# EAGLE board example_1 (EAGLE 7.0.0)
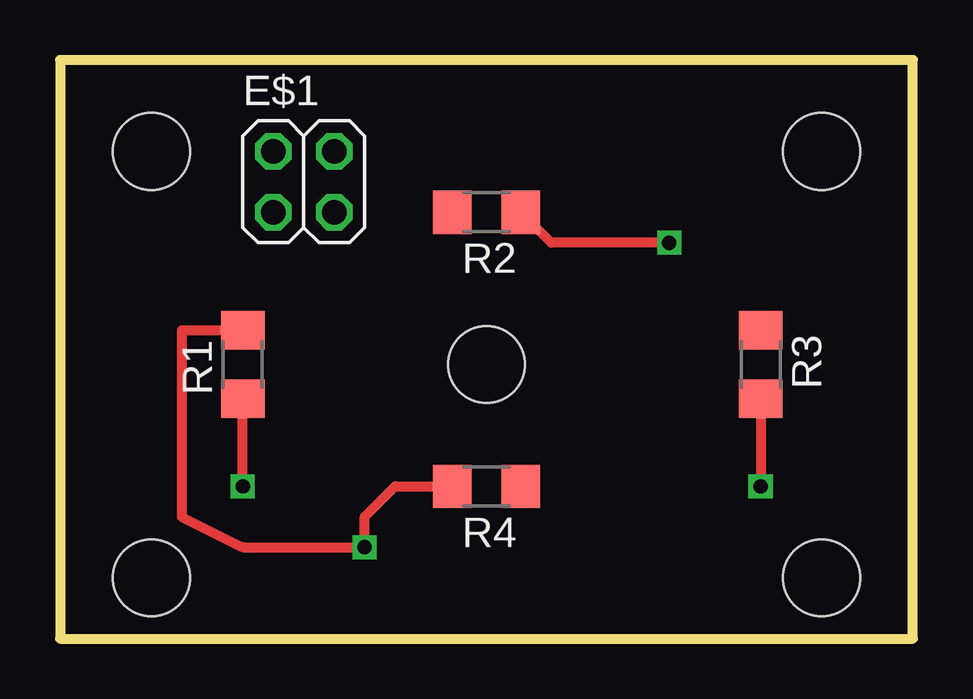
[diagram p0: board, top side]
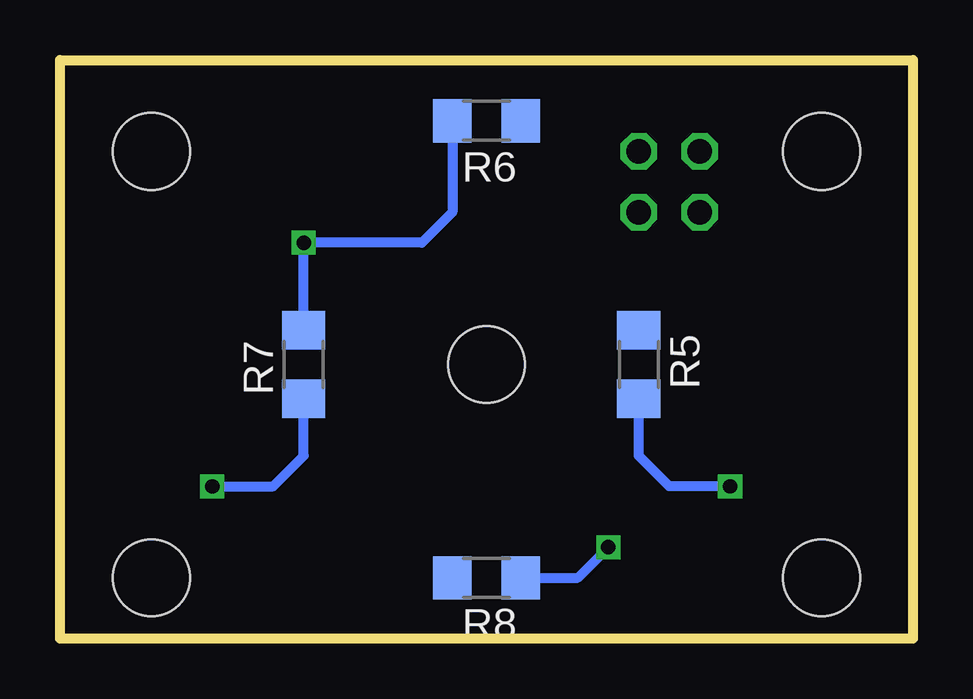
[diagram p1: board, bottom side, seen from below]

Size 35.56 x 24.13 mm. Coordinates in mm from the lower left corner, seen from the top.
Outline: 0,0 35.56,0 35.56,24.13 0,24.13 0,0
Copper layers (1*16): Top 0.035mm / dielectric 1.5mm / Bottom 0.035mm
Design rules "default": minimum track width 10mil, minimum drill 24mil, track to track 8mil, track to pad 8mil, pad to pad 8mil, via to via 8mil, smd to smd 8mil, copper to edge 40mil, drill to drill 8mil, minimum pad ring 10mil, minimum via ring 8mil, stop-mask expansion 4mil, vias tented up to drill 0mil, thermal gap 10mil
Holes 3.2 mm at 3.81,2.54 3.81,20.32 31.75,20.32 31.75,2.54 17.78,11.43
tKeepout: area 22.9,15.2 to 30.5,22.9; area 14.9,8.6 to 20.6,14.3
bKeepout: area 14.9,8.6 to 20.6,14.3
vRestrict: area 1.3,5.1 to 3.8,16.5; area 31.7,5.1 to 34.3,16.5

## Footprints (pad centres in the part's own frame; a part is rotated, then mirrored left to right if it is on the bottom)
2X02 = drill 1.016 octagon: 1 -1.27,-1.27; 2 -1.27,1.27; 3 1.27,-1.27; 4 1.27,1.27
R1206 = smd 1.6 x 1.803: 1 -1.422,0; 2 1.422,0

## Placement (x,y rotation side)
E$1  [2X02]  10.16,19.05 0 top
R1  [R1206]  7.62,11.43 90 top
R2  [R1206]  17.78,17.78 180 top
R3  [R1206]  29.21,11.43 270 top
R4  [R1206]  17.78,6.35 180 top
R5  [R1206]  11.43,11.43 270 bottom
R6  [R1206]  17.78,21.59 180 bottom
R7  [R1206]  25.4,11.43 90 bottom
R8  [R1206]  17.78,2.54 180 bottom

## Library data of the parts
E$1 = pinhead
R1-R8 = eagle-ltspice

## Nets
S$5: R1.1 R5.2
S$6: R1.2 R4.2 R8.1
S$7: R3.2 R7.1
S$8: R2.1 R6.2 R7.2

## Tracks (layer width: path | path; a pad name or v marks a point on that pad's centre or on a via)
S$1  (via drill 0.6)
  other vias: 7.62,6.35
S$2  (via drill 0.6)
  other vias: 29.21,6.35
S$3  (via drill 0.6)
  other vias: 25.4,16.51
S$5  (via drill 0.6)
  Top 0.406: v7.62,6.35 R1.1
  Bottom 0.406: v7.62,6.35 10.16,6.35 11.43,7.62 R5.2
S$6  (via drill 0.6)
  Top 0.406: R1.2 5.08,12.85 5.08,5.08 7.62,3.81 v12.7,3.81 12.7,5.08 13.97,6.35 R4.2
  Bottom 0.406: R8.1 13.97,2.54 v12.7,3.81
S$7  (via drill 0.6)
  Top 0.406: R3.2 v29.21,6.35
  Bottom 0.406: v29.21,6.35 26.67,6.35 25.4,7.62 R7.1
S$8  (via drill 0.6)
  Top 0.406: v25.4,16.51 20.47,16.51 R2.1
  Bottom 0.406: R7.2 v25.4,16.51 20.47,16.51 R2.1 R6.2